# EAGLE board CKT señal senoidal como entrada analogica (EAGLE 9.6.2)
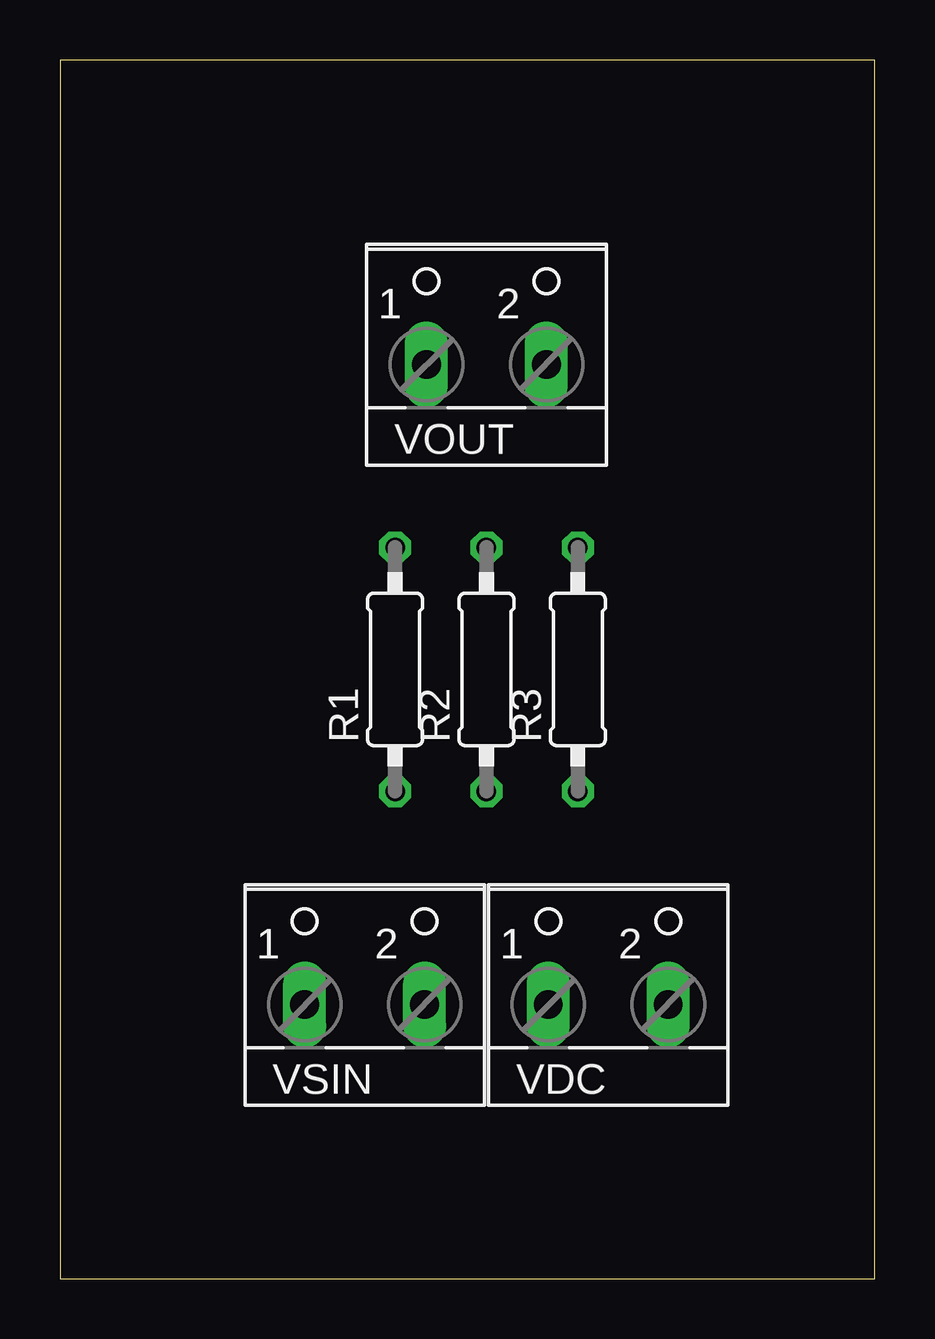
[diagram p0: board, top side]
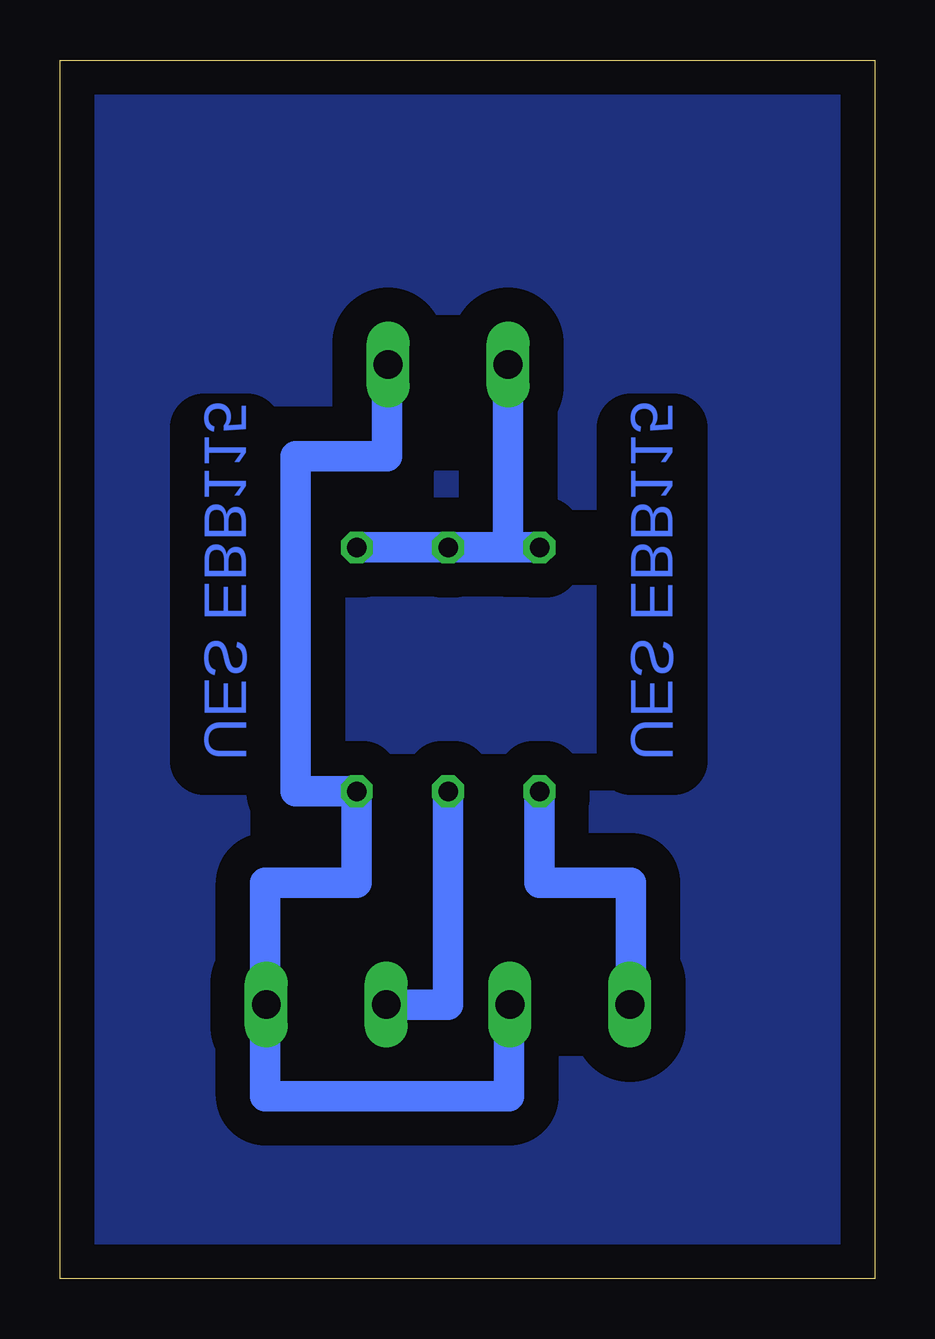
[diagram p1: board, bottom side, seen from below]

Size 33.96 x 50.79 mm. Coordinates in mm from the lower left corner, seen from the top.
Outline: 0,0 33.96,0 33.96,50.79 0,50.79 0,0
Copper layers (1*16): Top 0.035mm / dielectric 1.5mm / Bottom 0.035mm
Design rules "default": minimum track width 6mil, minimum drill 0.35mm, track to track 6mil, track to pad 6mil, pad to pad 6mil, via to via 6mil, smd to smd 6mil, copper to edge 40mil, drill to drill 6mil, minimum pad ring 10mil, minimum via ring 8mil, stop-mask expansion 4mil, vias tented up to drill 0mil, thermal gap 10mil

## Footprints (pad centres in the part's own frame; a part is rotated, then mirrored left to right if it is on the bottom)
0207/10 = drill 0.813 octagon: 1 -5.08,0; 2 5.08,0
W237-102 = drill 1.194 long: 1 -2.5,-1.27; 2 2.5,-1.27

## Placement (x,y rotation side)
R1  1k  [0207/10]  13.97,25.4 90 top
R2  1k  [0207/10]  17.78,25.4 90 top
R3  2k  [0207/10]  21.59,25.4 90 top
VDC  [W237-102]  22.86,12.7 0 top
VOUT  [W237-102]  17.78,39.37 0 top
VSIN  [W237-102]  12.7,12.7 0 top

## Library data of the parts
R1-R3 = rcl; SPICEPREFIX: R
VDC VOUT VSIN = con-wago-500; MPN: 237-102; OC_FARNELL: unknown; OC_NEWARK: 70K9898

## Nets
+10V: R2.1 VDC.1
GND: R3.1 VDC.2 VOUT.2 VSIN.2
N$2: R1.2 R2.2 R3.2 VOUT.1
V+: R1.1 VSIN.1

## Tracks (layer width: path | path; a pad name or v marks a point on that pad's centre or on a via)
+10V
  Bottom 1.27: VDC.1 17.78,11.43 R2.1
GND
  Bottom 1.27: VOUT.2 20.32,38.1 20.32,34.29 24.13,34.29 24.13,20.32 R3.1 21.59,16.51 25.4,16.51 25.4,11.43 | VDC.2 25.4,11.43 | VSIN.2 15.24,11.43 15.24,7.62 25.4,7.62 25.4,11.43
N$2
  Bottom 1.27: VOUT.1 15.28,30.48 R1.2 R2.2 R3.2
POLIGONO
  pour Bottom (isolate 1.422): 0,50.8 0,0 34.29,0 34.29,50.8
V+
  Bottom 1.27: VSIN.1 10.16,11.43 10.16,16.51 13.97,16.51 R1.1

## Text on the board
Bottom: UES EBB115 | UES EBB115